# Altium PCB delta-pcb.PcbDoc
Units mm, origin at the board's own origin, x right, y up, seen from the top; angles counter-clockwise.
Board outline 128.02 x 32.76 mm, 2 copper layers (Top Layer, Bottom Layer); 9 components, 8 nets, 75 pads, 0 vias.
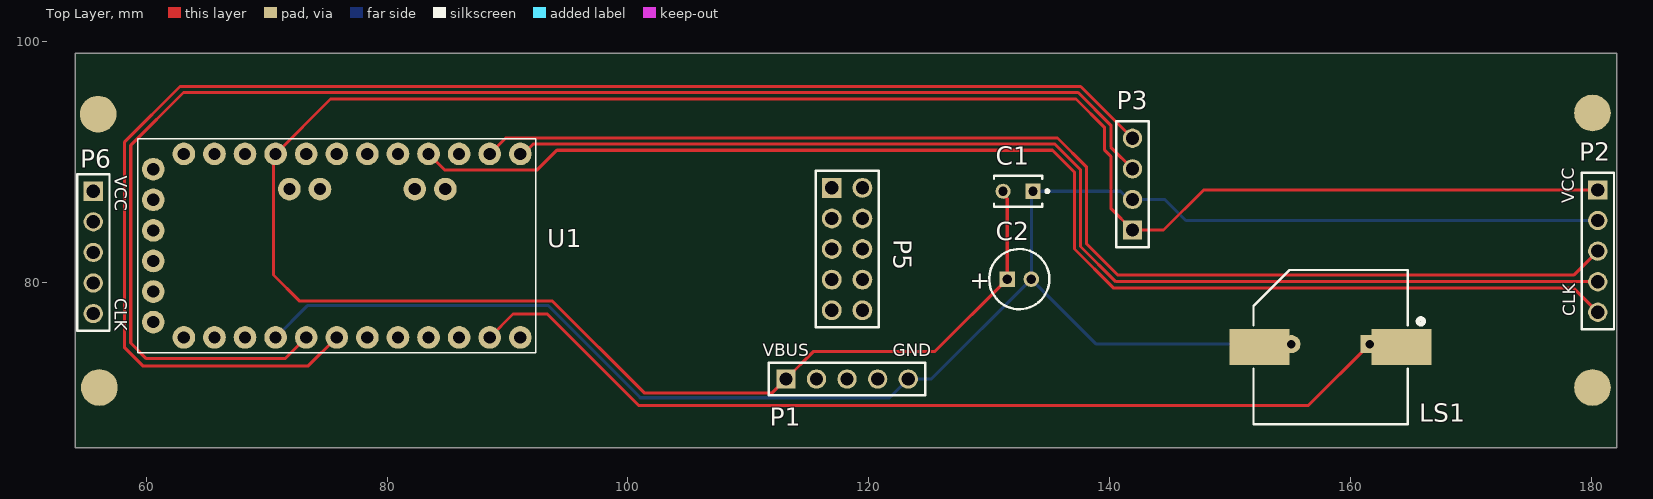
[diagram p0: Top Layer view]
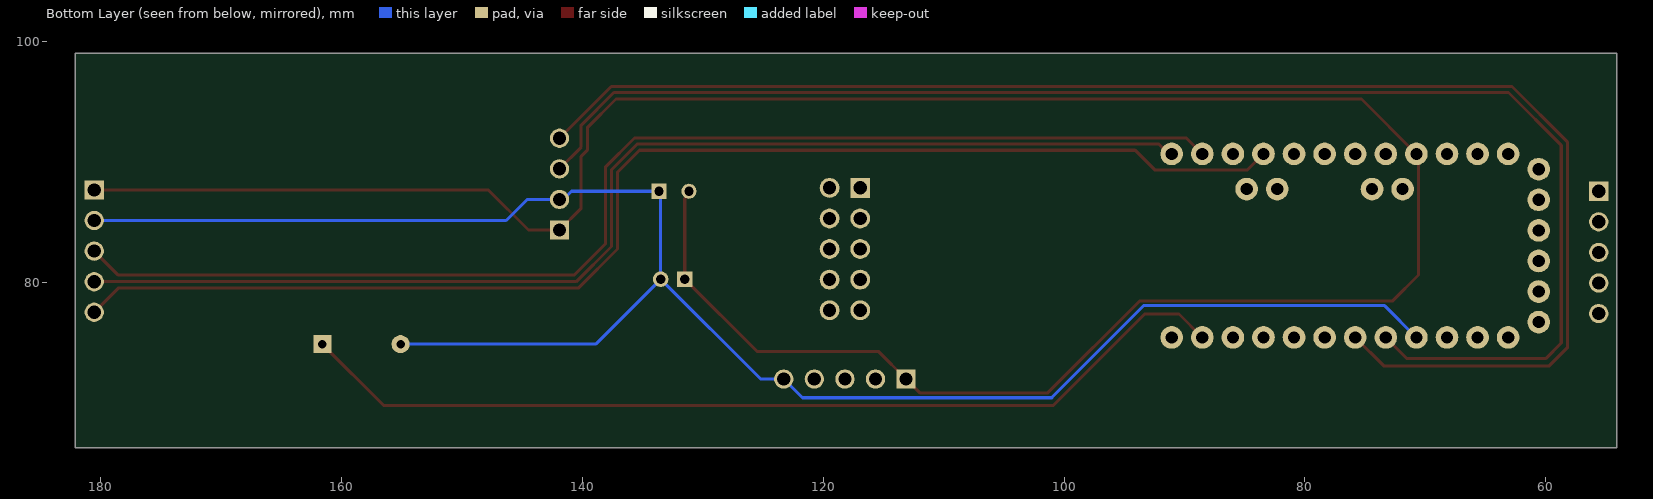
[diagram p1: Bottom Layer view, seen from below]
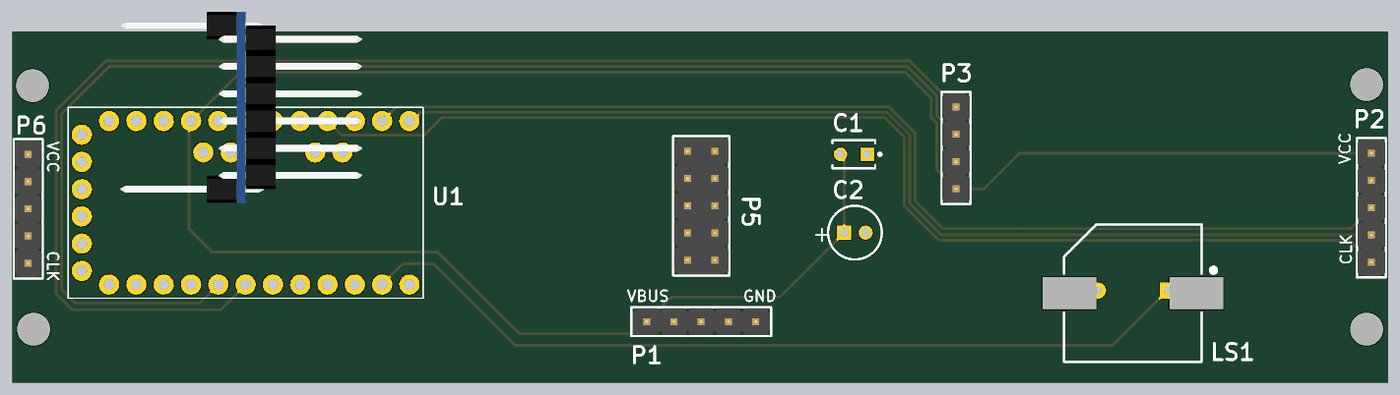
[diagram p2: 3D render of the assembled board from above, using the file's embedded part models]

## Layer stack, top to bottom
Top Solder: solder mask 0.0102, Solder Resist, Dk 3.5
Top Layer: signal copper 0.0356
Dielectric 1: dielectric 0.32, FR-4, Dk 4.8
Bottom Layer: signal copper 0.0356
Bottom Solder: solder mask 0.0102, Solder Resist, Dk 3.5

## Board outline
54.1,66.3 182.118,66.3 182.118,99.06 54.1,99.06

## Design rules (kind name [scope] priority, off if disabled: settings)
Clearance [All] p1: gap=0.254 ignorepadtopadclearanceinfootprint=FALSE except(0: Arc-Hole Track-Hole SMDPad-Hole THPad-Hole Via-Hole Fill-Hole Poly-Hole Region-Hole Text-Hole)
PolygonConnect [All] p1: connectstyle=Relief reliefconductorwidth=0.254 reliefentries=4 polygonreliefangle="90 Angle" airgapwidth=0.254
RoutingVias [All] p1: holewidth=0.711 width=1.27 viastyle="Through Hole" minholewidth=0.711 minwidth=1.27 maxholewidth=0.711 maxwidth=1.27
SolderMaskExpansion [All] p1: expansion=0.102 istentingtop=FALSE
Width [All] p1: maxlimit=0.254 minlimit=0.254 preferedwidth=0.254
30 further rules are at their usual default settings.

## Classes and differential pairs
component class delta-pcb-main: C1 C2 LS1 P1 P2 P3 U1

## Components (designator, comment, footprint, x,y, rotation, side; value= is the part's Value field where it differs from the comment)
C1 "100nF" VISH-K104K15X7RF5TL2 132.4,87.6 r180 top
C2 "4.7uF" CAPPR55-200-1100X500X1200 132.5,80.3 r0 top
LS1 "Buzzer" ABSM-1574 164.25,74.66 r180 top
P1 "μUSB-B Breakout" 61300511121 118.2,72 r0 top
P2 "FC16 LED Matrix - Right" 61300511121 180.543,82.626 r270 top
P3 "AT09" 61300411121 141.9,88.19 r90 top
P5 "LED - Middle" 61301021121 118.2,82.8 r270 top
P6 "Comment" 61300511121 55.6,82.52 r270 top
U1 "ARDUINO_PRO_MINI" MODULE_ARDUINO_PRO_MINI 75.82,83.08 r90 top

## Footprints (in the part's own frame and the unit in brackets; to place one, negate y for a bottom-side part, rotate by r counter-clockwise, add the part's x,y. Pads: shape width x height; smd on the part's side, far side on the other; paste and mask are expansions set on the pad)
61300411121 [mm] "Pin Header, pitch 2.54 mm, THT, Vertical, single row, 4p"
  rect 1.6x1.6 hole 1.1: 1(-3.81,0)
  round 1.6 hole 1.1: 2(-1.27,0) 3(1.27,0) 4(3.81,0)
  silkscreen extent -5.23,-1.35 5.23,1.35, body extent -5.08,-1.27 5.08,1.27, height 8.57
61300511121 [mm] "Pin Header, pitch 2.54 mm, THT, Vertical, single row, 5p"
  rect 1.6x1.6 hole 1.1: 1(-5.08,0)
  round 1.6 hole 1.1: 2(-2.54,0) 3(0,0) 4(2.54,0) 5(5.08,0)
  silkscreen extent -6.5,-1.35 6.5,1.35, body extent -6.35,-1.27 6.35,1.27, height 8.57
61301021121 [mm] "Pin Header, pitch 2.54 mm, THT, Vertical, dual row, 10p"
  rect 1.65x1.65 hole 1.1: 1(-5.08,-1.27)
  round 1.65 hole 1.1: 2(-5.08,1.27) 3(-2.54,-1.27) 4(-2.54,1.27) 5(0,-1.27) 6(0,1.27) 7(2.54,-1.27) 8(2.54,1.27) 9(5.08,-1.27) 10(5.08,1.27)
  silkscreen extent -6.5,-2.62 6.5,2.62, body extent -6.35,-2.54 6.35,2.54, height 8.59
ABSM-1574 [mm] "Magnetic Transducer Buzzer"
  rect 5x3 smd: 1(0,0) 2(11.8,0)
  rect 1.5x1.5 hole 0.7: 1A(2.65,-0.24)
  round 1.5 hole 0.7: 2A(9.15,-0.24)
  silkscreen extent -1.83,-6.4 12.3,6.4
CAPPR55-200-1100X500X1200 [mm] "THD, 2-Leads, Dia 5mm, Body Length 11mm"
  rect 1.3x1.3 hole 0.8: 1(-1,0)
  round 1.3 hole 0.8: 2(1,0)
  silkscreen extent -2.5,-2.5 2.5,2.5, body extent -2.5,-2.5 2.5,2.5, height 12
MODULE_ARDUINO_PRO_MINI [mil]
  round 74 hole 40: JP1_1(250,600) JP1_2(150,600) JP1_3(50,600) JP1_4(-50,600) JP1_5(-150,600) JP1_6(-250,600) JP2_1(185,55) JP2_2(185,155) JP3_1(185,-355) JP3_2(185,-255) JP6_1(300,500) JP6_2(300,400) JP6_3(300,300) JP6_4(300,200) JP6_5(300,100) JP6_6(300,0) JP6_7(300,-100) JP6_8(300,-200) JP6_9(300,-300) JP6_10(300,-400) JP6_11(300,-500) JP6_12(300,-600) JP7_1(-300,-600) JP7_2(-300,-500) JP7_3(-300,-400) JP7_4(-300,-300) JP7_5(-300,-200) JP7_6(-300,-100) JP7_7(-300,0) JP7_8(-300,100) JP7_9(-300,200) JP7_10(-300,300) JP7_11(-300,400) JP7_12(-300,500)
  silkscreen extent -350,-650 350,650, body extent 0,-426 700,457, height 1300
VISH-K104K15X7RF5TL2 [mm] "THD, 2-Leads, Body 4x2.6mm"
  rect 1.25x1.25 hole 0.75: 1(-1.25,0)
  round 1.25 hole 0.75: 2(1.25,0)
  silkscreen extent -2.55,-1.3 2,1.3, body extent -2,-1.3 2,1.3, height 5.6

## Part data
C1: library part CMP-2000-06508-1, "Ceramic Capacitor, 100 nF, +/- 10%, 50 V, -55 to 125 degC, 2-Pin THD, RoHS, Tape and Reel", Capacitance=0.1µF, Manufacturer=Vishay, Operating Temperature=-55°C~125°C, Package / Case=Radial, Package Description="2-Pin Through Hole Device, Body 4 x 2.6 mm", Package Reference=K104K15X7RF5TL2, Ratings=-, Standard Package=1, Temperature Coefficient=X7R, Tolerance=±10%, Voltage - Rated=50V, Applications=GeneralPurpose, Catalog Drawings=Mono-KapSide2-15_5.58Mono-KapSide1_15, Category=Capacitors, Datasheet URL=http://www.vishay.com/docs/45171/kseries.pdf, Datasheet Version=08/2013, Family=CeramicCapacitors, Features=-, Height - Seated (Max)="0.220\"(5.58mm)", Lead Spacing="0.098\"(2.50mm)", Lead Style=Straight, Manufacturer URL=http://www.vishay.com/, Mounting Technology=ThroughHole, Mounting Type=ThroughHole, Online Catalog=Mono-Kap™Series, Other Names=BC1084CT, Packaging=CutTape(CT), Series=Mono-Kap™K, Size / Dimension="0.157\"Lx0.098\"W(4.00mmx2.50mm)", Thickness (Max)=-
C2: library part CMP-1665-00037-2, "Aluminum Electrolytic Capacitor, 4.7 uF, +/- 20%, 50 V, -40 to 85 degC, 2-Pin THD, RoHS, Bulk", Case/Package=Radial, Dielectric Material=Aluminium, Leakage Current=3uA, Manufacturer=Panasonic, Max Operating Temperature=85degC, Min Operating Temperature=-40degC, Package Description="2-Pin Radial Lead, Dia 5 mm, Height 12 mm", Package Quantity=200, Package Reference=CAPPR55-200-1100X500X1200, Ripple Current=45mA, Tolerance=20%, Voltage=50V, Capacitance=4.7uF, Datasheet URL=https://industrial.panasonic.com/cdbs/www-data/pdf/RDF0000/ABA0000C1218.pdf, Datasheet Version="Rev. 05, 10/2016", Diameter=5mm, Dissipation Factor=0.12%, Height=11mm, Height - Seated (Max)=0.472inch, Lead Diameter=0.5mm, Lead Free=LeadFree, Lead Pitch=2mm, Lead/Base Style=Straight, Length=11mm, Life (Hours)=2000Hour, Manufacturer URL=http://www.panasonic.com/, Mount=ThroughHole, Number of Pins=2, Packaging=Bulk, Radiation Hardening=No, REACH SVHC=NoSVHC, Ripple Current (AC)=45mA, RoHSCompliant=true, Termination=Radial, Voltage Rating=50V, Voltage Rating (DC)=50V, Width=0inch
LS1: "Magnetic Transducer Buzzer", ComponentLink1Description="Manufacturer Link", ComponentLink1URL=http://www.megastar.com/linecard/buzzmode/index.php, DatasheetVersion=17-Dec-2003, LatestRevisionDate=17-Dec-2003, LatestRevisionNote="Schematic revised, PCB Footprint replaced.", PackageDescription="Magnetic Transducer Buzzer", PackageReference=ABSM-1574, Published=24-Mar-1999, Publisher="Altium Limited"
P1 P2: library part CMP-1502-01068-1, "THT Vertical Pin Header WR-PHD, Pitch 2.54 mm, Single Row, 5 pins", Contact Resistance=20mOhm, Manufacturer="Wurth Elektronik", Operating Temperature=-40to105degC, Package Reference=61300511121, Rated Current=3A, Withstanding Voltage=500VAC, Working Voltage=250VAC, Datasheet URL=https://katalog.we-online.de/em/datasheet/6130xx11121.pdf, Gender=Male, Manufacturer URL=http://www.we-online.de, Mounting Technology=THT, Orientation=Vertical, Packaging=Bag, Part Number=61300511121, Pin Number=5, Pitch=2.54mm, Publisher=WurthElektronik, Row Number=Single
P3: library part CMP-1502-01064-1, "THT Vertical Pin Header WR-PHD, Pitch 2.54 mm, Single Row, 4 pins", Contact Resistance=20mOhm, Manufacturer="Wurth Elektronik", Operating Temperature=-40to105degC, Package Reference=61300411121, Rated Current=3A, Withstanding Voltage=500VAC, Working Voltage=250VAC, Datasheet URL=https://katalog.we-online.de/em/datasheet/6130xx11121.pdf, Gender=Male, Manufacturer URL=http://www.we-online.de, Mounting Technology=THT, Orientation=Vertical, Packaging=Bag, Part Number=61300411121, Pin Number=4, Pitch=2.54mm, Publisher=WurthElektronik, Row Number=Single
U1: "ATmega328 Arduino Pro Mini 328 5V/16MHz AVRÂ® ATmega AVR MCU 8-Bit Embedded Evaluation Board", Package=None, Availability=Unavailable, MF="{'manufacturer': u'Arduino'}", MP=ARDUINO_PRO_MINI, Price=None

## Free pads (board coordinates)
  round 3.05 smd: PTH1(56,94) PTH2(180.1,94.1) PTH3(56.1,71.3) PTH4(180.1,71.3)

## Nets (pads, with @x,y where several pads share a name; then routed paths per layer and width w, separated by ;. In a path a pad name is that pad's centre, name@x,y a point inside that pad or via, vN(x,y) a via of type N, cw(c..) or ccw(c..) an arc to the next point about the centre after c; other vN are vias at no path point)
GND: C1.1 C2.2 LS1.2 LS1.2A P1.5 P2.2 P3.2 U1.JP7_9 | length 150.4
  Top Layer w0.254: C1.1@133.5,87.45 C1.1
  Bottom Layer w0.254: U1.JP7_9 73.38,78.1 93.4,78.1 101,70.5 101,70.449 121.729,70.449 P1.5 125.2,72 C2.2 ; LS1.2A 138.9,74.9 C2.2 ; P2.2 146.334,85.166 144.58,86.92 P3.2 141.59,86.92 140.91,87.6 C1.1 133.5,87.45 C2.2
NetLS1_1: LS1.1 LS1.1A U1.JP7_2 | length 79.1
  Top Layer w0.254: U1.JP7_2 90.46,77.4 93.3,77.4 100.9,69.8 156.5,69.8 LS1.1A
NetP2_3: P2.3 U1.JP6_11 | length 101.8
  Top Layer w0.254: U1.JP6_11 89.841,92.021 135.679,92.021 138.1,89.6 138.1,83.218 140.659,80.659 178.576,80.659 P2.3
NetP2_4: P2.4 U1.JP6_12 | length 98.3
  Top Layer w0.254: U1.JP6_12 91.302,90.7 92.115,91.513 135.469,91.513 137.591,89.391 137.591,83.009 140.514,80.086 P2.4 P2.4@180.529,80.1
NetP2_5: P2.5 U1.JP6_9 | length 107.7
  Top Layer w0.254: U1.JP6_9 84.761,89.379 92.474,89.379 94.1,91.005 135.258,91.005 137.083,89.18 137.083,82.799 140.303,79.578 178.511,79.578 P2.5 P2.5@180.543,77.608
NetP3_3: P3.3 U1.JP7_8 | length 120.9
  Top Layer w0.254: U1.JP7_8 71.52,73.7 60,73.7 58.708,74.992 58.708,91.408 63.092,95.792 137.39,95.792 140.1,93.082 140.1,91.26 P3.3
NetP3_4: P3.4 U1.JP7_7 | length 123.7
  Top Layer w0.254: U1.JP7_7 73.46,73.1 59.7,73.1 58.2,74.6 58.2,91.7 62.8,96.3 137.6,96.3 P3.4
VCC: C1.2 C2.1 P1.1 P2.1 P3.1 U1.JP6_4 | length 207.7
  Top Layer w0.254: C1.2 131.15,87.33 131.5,86.98 C2.1 125.5,74.3 115.42,74.3 P1.1 111.977,70.857 101.343,70.857 93.7,78.5 72.7,78.5 70.562,80.638 70.562,90.522 U1.JP6_4 75.3,95.26 137.203,95.26 139.592,92.871 139.592,91.008 140.1,90.5 140.1,86.18 P3.1 144.48,84.38 147.806,87.706 P2.1
pads on no net: P1.2 P1.3 P1.4 P5.1 P5.2 P5.3 P5.4 P5.5 P5.6 P5.7 P5.8 P5.9 P5.10 P6.1 P6.2 P6.3 P6.4 P6.5 U1.JP1_1 U1.JP1_2 U1.JP1_3 U1.JP1_4 U1.JP1_5 U1.JP1_6 U1.JP2_1 U1.JP2_2 U1.JP3_1 U1.JP3_2 U1.JP6_1 U1.JP6_2 U1.JP6_3 U1.JP6_5 U1.JP6_6 U1.JP6_7 U1.JP6_8 U1.JP6_10 U1.JP7_1 U1.JP7_3 U1.JP7_4 U1.JP7_5 U1.JP7_6 U1.JP7_10 U1.JP7_11 U1.JP7_12
copper on no net: | length 0.1
  Top Layer w0.254: 141.9,86.92 141.9,87

## Dimensions
182.118,99.314 to 182.118,66.3 on Multi-Layer
54.1,99.06 to 182.118,99.06 on Multi-Layer

## Text inside footprints (layer, text, board x,y; h text height)
C2: Top Overlay "+" at 128.4,79.5 h1.5
P1: Top Overlay "VBUS" at 111.2,73.9 h1.02; Top Overlay "GND" at 122,73.9 h1.02
P2: Top Overlay "VCC" at 178.573,86.6 h1.02 r90; Top Overlay "CLK" at 178.673,77.2 h1.02 r90
P6: Top Overlay "VCC" at 57.4,88.9 h1.02 r270; Top Overlay "CLK" at 57.4,78.7 h1.02 r270